# Altium PCB Mainboard.PcbDoc (part 1 of 2)
Units mm, origin at the board's own origin, x right, y up, seen from the top; angles counter-clockwise.
Board outline 100 x 100 mm, 10 copper layers (L1 SIG, L2 GND, L3 SIG HS, L4 SIG HS, L5 VDD, L6 GND, L7 SIG HS, L8 SIG HS, L9 VCC, L10 SIG), stack 1.573 mm thick; 241 components, 320 nets, 1344 pads, 20 vias.
Unrouted connection lines stored in the file: 832.
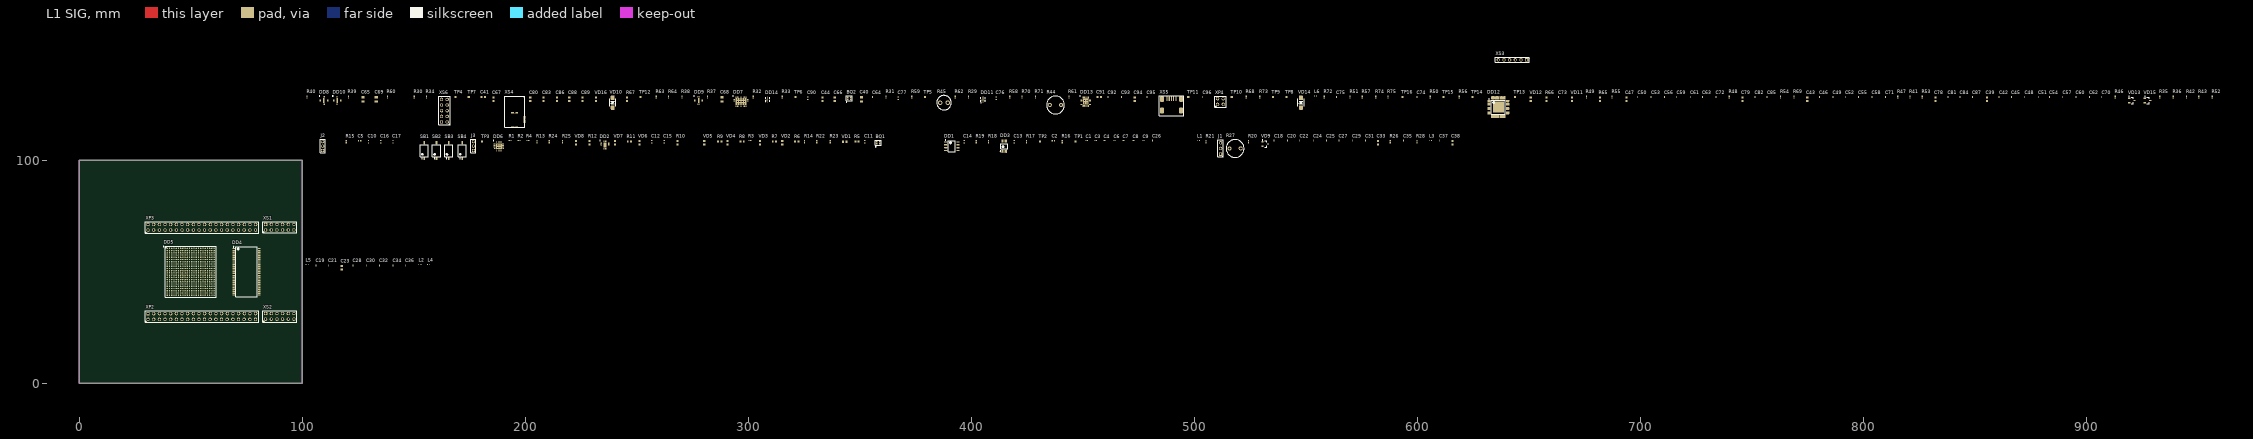
[diagram p0: L1 SIG view]
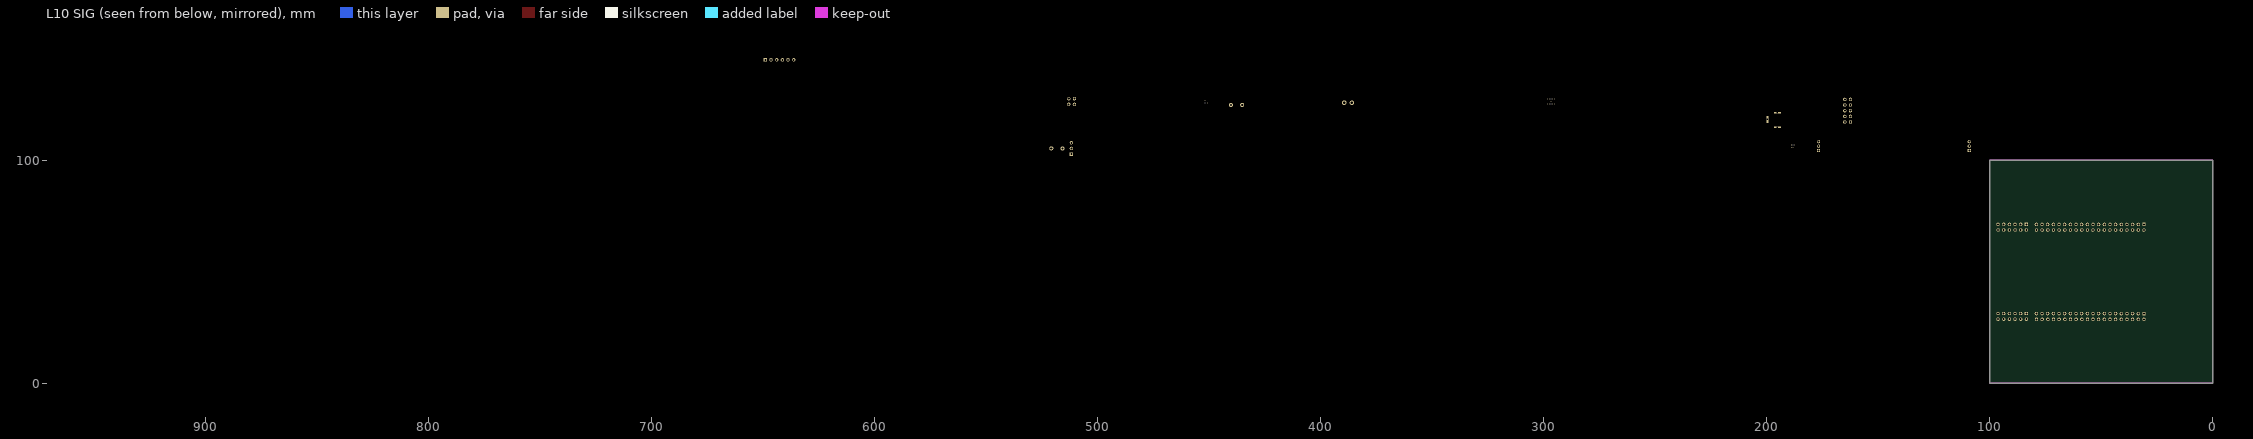
[diagram p1: L10 SIG view, seen from below]

## Layer stack, top to bottom
Top Solder: solder mask 0.0127, Solder Resist, Dk 3.3
L1 SIG: signal copper 0.0356
Dielectric 1: prepreg 0.0762, Dk 4.3
L2 GND: signal copper 0.0356
Dielectric 2: core 0.127, FR-4, Dk 4.3
L3 SIG HS: signal copper 0.0356
Dielectric 3: prepreg 0.127, Dk 4.3
L4 SIG HS: signal copper 0.0356
Dielectric 4: core 0.127, FR-4, Dk 4.3
L5 VDD: signal copper 0.0356
Dielectric 5: prepreg 0.3028, Dk 4.3
L6 GND: signal copper 0.0356
Dielectric 6: core 0.127, FR-4, Dk 4.3
L7 SIG HS: signal copper 0.0356
Dielectric 7: prepreg 0.127, Dk 4.3
L8 SIG HS: signal copper 0.0356
Dielectric 8: core 0.127, FR-4, Dk 4.3
L9 VCC: signal copper 0.0356
Dielectric 9: prepreg 0.0762, Dk 4.3
L10 SIG: signal copper 0.0356
Bottom Solder: solder mask 0.0127, Solder Resist, Dk 3.3

## Board outline
0,0 100,0 100,100 0,100

## Design rules (kind name [scope] priority, off if disabled: settings)
Clearance [All] p1: gap=0.1 ignorepadtopadclearanceinfootprint=FALSE
PolygonConnect [All] p1: connectstyle=Relief reliefconductorwidth=0.254 reliefentries=4 polygonreliefangle="90 Angle" airgapwidth=0.254
RoutingLayers [All] p1: top layer_v5=TRUE mid layer 1_v5=FALSE mid layer 2_v5=FALSE mid layer 3_v5=FALSE mid layer 4_v5=FALSE mid layer 5_v5=FALSE mid layer 6_v5=FALSE mid layer 7_v5=FALSE mid layer 8_v5=FALSE bottom layer_v5=TRUE
RoutingVias [All] p1: holewidth=0.1 width=0.2 viastyle="Through Hole" minholewidth=0.711 minwidth=1.27 maxholewidth=0.711 maxwidth=1.27
SolderMaskExpansion [All] p1: expansion=0.102
Width [All] p1: maxlimit=0.1 minlimit=0.1 preferedwidth=0.1
29 further rules are at their usual default settings.

## Classes and differential pairs
component class 01: BQ1 C1 C2 C3 C4 C5 C6 C7 C8 C9 C10 C11 C12 C13 C14 C15 C16 C17 C18 C19 C20 C21 C22 C23 C24 C25 C26 C27 C28 C29 C30 C31 C32 C33 C34 C35 C36 C37 C38 DD1 DD2 DD3 DD4 DD5 DD6 J1 J2 J3 L1 L2 L3 L4 L5 R1 R2 R3 R4 R5 R6 R7 R8 R9 R10 R11 R12 R13 R14 R15 R16 R17 R18 R19 R20 R21 R22 R23 R24 R25 R26 R27 R28 SB1 SB2 SB3 SB4 TP1 TP2 TP3 VD1 VD2 VD3 VD4 VD5 VD6 VD7 VD8 VD9 XP1 XP2 XP3 XS1 XS2
component class 02: BQ2 C39 C40 C41 C42 C43 C44 C45 C46 C47 C48 C49 C50 C51 C52 C53 C54 C55 C56 C57 C58 C59 C60 C61 C62 C63 C64 C65 C66 C67 C68 C69 C70 C71 C72 C73 C74 C75 C76 C77 C78 C79 C80 C81 C82 C83 C84 C85 C86 C87 C88 C89 C90 C91 C92 C93 C94 C95 C96 DD7 DD8 DD9 DD10 DD11 DD12 DD13 DD14 L6 R29 R30 R31 R32 R33 R34 R35 R36 R37 R38 R39 R40 R41 R42 R43 R44 R45 R46 R47 R48 R49 R50 R51 R52 R53 R54 R55 R56 R57 R58 R59 R60 R61 R62 R63 R64 R65 R66 R67 R68 R69 R70 R71 R72 R73 R74 R75 TP4 TP5 TP6 TP7 TP8 TP9 TP10 TP11 TP12 TP13 TP14 TP15 TP16 VD10 VD11 VD12 VD13 VD14 VD15 VD16 XP4 XS3 XS4 XS5 XS6

## Components (designator, comment, footprint, x,y, rotation, side; value= is the part's Value field where it differs from the comment)
BQ1 "Сlock 50 MHz 50ppm" Crystal_Clock_SMD 358.199,107.8 r0 top
BQ2 "Clock 24 MHz 50ppm DNI" Crystal_Clock_SMD 345.199,127.8 r0 top
C1 "1u" CAPC0603X03L 451.699,108.8 r0 top
C2 "100n" Cap_0402 436.699,108.8 r0 top
C3 "100n" CAPC0603X03L 455.699,108.8 r0 top
C4 "1u" CAPC0603X03L 459.699,108.8 r0 top
C5 "1u" Cap_0402 125.7,108.8 r0 top
C6 "100n" CAPC0603X03L 464.199,108.8 r0 top
C7 "1u" CAPC0603X03L 468.199,108.8 r0 top
C8 "100n" CAPC0603X03L 472.699,108.8 r0 top
C9 "10n" CAPC0603X03L 477.199,108.8 r0 top
C10 "1u" Cap_0402 129.7,108.3 r90 top
C11 "100n" Cap_0402 352.199,108.3 r90 top
C12 "1u" Cap_0402 256.699,108.3 r90 top
C13 "10n" Cap_0402 419.199,108.3 r90 top
C14 "100n" Cap_0402 396.699,108.3 r90 top
C15 "1u" Cap_0402 262.199,108.3 r90 top
C16 "1u" Cap_0402 135.2,108.3 r90 top
C17 "1u" Cap_0402 140.7,108.3 r90 top
C18 "10n" CAPC0603X03L 535.699,108.8 r90 top
C19 "100n" CAPC0603X03L 106.2,52.8 r90 top
C20 "10n" CAPC0603X03L 541.699,108.8 r90 top
C21 "100n" CAPC0603X03L 111.7,52.8 r90 top
C22 "10n" CAPC0603X03L 547.199,108.8 r90 top
C23 "10u" Cap_0603 117.7,51.8 r90 top
C24 "100n" CAPC0603X03L 553.199,108.8 r90 top
C25 "100n" CAPC0603X03L 559.199,108.8 r90 top
C26 "100n" CAPC0603X03L 481.199,108.8 r90 top
C27 "100n" CAPC0603X03L 564.699,108.8 r90 top
C28 "100n" CAPC0603X03L 122.7,52.8 r90 top
C29 "1u" CAPC0603X03L 570.699,108.8 r90 top
C30 "100n" CAPC0603X03L 128.7,52.8 r90 top
C31 "1u" CAPC0603X03L 576.699,108.8 r90 top
C32 "100n" CAPC0603X03L 134.7,52.8 r90 top
C33 "10u" Cap_0603 582.199,107.8 r90 top
C34 "100n" CAPC0603X03L 140.7,52.8 r90 top
C35 "100n" CAPC0603X03L 593.699,108.8 r90 top
C36 "100n" CAPC0603X03L 146.2,52.8 r90 top
C37 "100n" CAPC0603X03L 609.699,108.8 r90 top
C38 "10u" Cap_0603 615.699,107.8 r90 top
C39 "10u" Cap_0603 855.198,127.3 r90 top
C40 "10u" Cap_0805 350.699,127.3 r90 top
C41 "4.7u" Cap_0603 181.2,128.3 r0 top
C42 "1u" CAPC0603X03L 860.698,128.3 r90 top
C43 "10u" Cap_0603 774.698,127.3 r90 top
C44 "1u" Cap_0603 333.199,127.3 r90 top
C45 "1u" CAPC0603X03L 866.198,128.3 r90 top
C46 "1u" CAPC0603X03L 780.198,128.3 r90 top
C47 "10u" Cap_0603 693.699,127.3 r90 top
C48 "100n" CAPC0603X03L 872.198,128.3 r90 top
C49 "100n" CAPC0603X03L 786.198,128.3 r90 top
C50 "1u" CAPC0603X03L 698.699,128.3 r90 top
C51 "100n" CAPC0603X03L 878.198,128.3 r90 top
C52 "100n" CAPC0603X03L 791.698,128.3 r90 top
C53 "100n" CAPC0603X03L 704.698,128.3 r90 top
C54 "100n" CAPC0603X03L 883.198,128.3 r90 top
C55 "10n" CAPC0603X03L 797.698,128.3 r90 top
C56 "100n" CAPC0603X03L 710.698,128.3 r90 top
C57 "10n" CAPC0603X03L 889.198,128.3 r90 top
C58 "10n" CAPC0603X03L 803.698,128.3 r90 top
C59 "10n" CAPC0603X03L 716.198,128.3 r90 top
C60 "10n" CAPC0603X03L 895.198,128.3 r90 top
C61 "10n" CAPC0603X03L 722.198,128.3 r90 top
C62 "10n" CAPC0603X03L 901.198,128.3 r90 top
C63 "100n" CAPC0603X03L 727.698,128.3 r90 top
C64 "6.8p" CAPC0603X03L 355.699,128.3 r90 top
C65 "10u" Cap_0805 127.2,127.3 r90 top
C66 "4.7u" Cap_0603 338.699,127.3 r90 top
C67 "4.7u" Cap_0603 185.7,127.3 r90 top
C68 "10u" Cap_0805 288.199,127.3 r90 top
C69 "10u" Cap_0805 133.2,127.3 r90 top
C70 "100n" CAPC0603X03L 906.698,128.3 r90 top
C71 "100n" CAPC0603X03L 809.698,128.3 r90 top
C72 "100n" CAPC0603X03L 733.698,128.3 r90 top
C73 "100n" CAPC0603X03L 663.199,128.3 r90 top
C74 "100n" CAPC0603X03L 599.699,128.3 r90 top
C75 "100n" CAPC0603X03L 563.699,128.3 r90 top
C76 "100n" Cap_0402 411.199,127.8 r90 top
C77 "100n" Cap_0402 367.199,127.8 r90 top
C78 "10u" Cap_0603 832.198,127.3 r90 top
C79 "10u" Cap_0603 745.698,127.3 r90 top
C80 "22u" Cap_0603 202.199,127.3 r90 top
C81 "100n" CAPC0603X03L 837.698,128.3 r90 top
C82 "100n" CAPC0603X03L 751.198,128.3 r90 top
C83 "10u" Cap_0603 208.199,127.3 r90 top
C84 "100n" CAPC0603X03L 843.198,128.3 r90 top
C85 "100n" CAPC0603X03L 756.698,128.3 r90 top
C86 "1u" Cap_0603 214.199,127.3 r90 top
C87 "100n" CAPC0603X03L 848.698,128.3 r90 top
C88 "100n" Cap_0603 219.699,127.3 r90 top
C89 "10n" Cap_0603 225.699,127.3 r90 top
C90 "100n" Cap_0402 326.699,127.8 r90 top
C91 "10u" Cap_0603 457.199,128.3 r0 top
C92 "1u" CAPC0603X03L 461.199,128.3 r90 top
C93 "100n" CAPC0603X03L 467.199,128.3 r90 top
C94 "22u" Cap_0603 473.199,127.3 r90 top
C95 "10n" CAPC0603X03L 478.699,128.3 r90 top
C96 "100n" CAPC0603X03L 503.699,128.3 r90 top
DD1 "16Mb serial flash M25P16-VMN6" "M25P16-VMN6 _serial_flash" 391.199,106.3 r0 top
DD2 "Accelerometer 16 pins" ADXL362_Accelerometer 235.699,106.8 r0 top
DD3 "12-bit DAC" "AD5681R_12-bit DAC" 414.699,106.3 r90 top
DD4 "SDRAM 8 MB 54 pins" SDRAM_IS42S16400J-7TL 75,50 r0 top
DD5 "MAX 10 FPGFA" 10M08DAF484_V2 50,50 r0 top
DD6 "Temperature sensor ADT7420" "ADT7420_temperature sensor" 188.2,106.3 r0 top
DD7 "Enpirion Power Supply, Vout 3.3V  - 24 pin" "Enpirion Power Supply_Vout 3.3V _24pin" 296.699,126.3 r0 top
DD8 "Enpirion Power Supply, Vout 2.5V, 1.8V, 1.5V" "Enpirion Power Supply_Vout 2.5V, 1.8V, 1.5V_16pin" 109.7,126.8 r0 top
DD9 "Enpirion Power Supply, Vout 2.5V, 1.8V, 1.5V" "Enpirion Power Supply_Vout 2.5V, 1.8V, 1.5V_16pin" 277.699,126.8 r0 top
DD10 "Enpirion Power Supply, Vout 2.5V, 1.8V, 1.5V" "Enpirion Power Supply_Vout 2.5V, 1.8V, 1.5V_16pin" 115.7,126.8 r0 top
DD11 "ESD for USB Bluster" ESD_TPD6E001RSER 405.199,127.3 r90 top
DD12 "MAX V 5M80ZE64" "MAX V 5M80ZE64" 636.199,123.8 r0 top
DD13 "FT240XQ FTDI for USB Bluster 24 pin" FFTDI_240XQ-T 451.199,126.3 r0 top
DD14 "ESD for USB Bluster" ESD_TPD6E001RSER 308.699,127.3 r90 top
J1 "Jumper_J3" "CONN_J3_PIN_HEADER_1x3_2.54mm _bootselect" 511.699,105.3 r90 top
J2 "Jumper_J9" CONN_J1,J9_PIN_HEADER_1x3_2.0mm 109.2,106.3 r90 top
J3 "Jumper_J1" CONN_J1,J9_PIN_HEADER_1x3_2.0mm 176.7,106.3 r90 top
L1 "4.7u" Inductor 501.699,108.8 r0 top
L2 "4.7u" Inductor 152.7,53.3 r0 top
L3 "4.7u" Inductor 605.699,108.8 r0 top
L4 "4.7u" Inductor 156.7,53.3 r0 top
L5 "4.7u" Inductor 102.2,53.3 r0 top
L6 "4.7u" Inductor 554.199,128.8 r0 top
R1 "10k" RESISTOR_0402 193.2,108.8 r0 top
R2 "10k" RESISTOR_0402 197.2,108.8 r0 top
R3 "0" RESISTOR_0402 300.699,108.8 r0 top
R4 "10k" RESISTOR_0402 201.199,108.8 r0 top
R5 "220" Resistor_0603 348.699,108.3 r0 top
R6 "220" Resistor_0603 321.699,108.3 r0 top
R7 "220" Resistor_0603 311.699,108.3 r0 top
R8 "220" Resistor_0603 297.199,108.3 r0 top
R9 "220" Resistor_0603 287.199,108.3 r0 top
R10 "220" Resistor_0603 268.199,107.8 r90 top
R11 "220" Resistor_0603 246.699,108.3 r0 top
R12 "220" Resistor_0603 228.699,107.8 r90 top
R13 "10k" RESISTOR_0402 205.199,108.3 r90 top
R14 "10k" RESISTOR_0402 325.199,108.3 r90 top
R15 "10k" RESISTOR_0402 119.7,108.3 r90 top
R16 "10k" RESISTOR_0402 440.699,108.3 r90 top
R17 "10k" RESISTOR_0402 424.699,108.3 r90 top
R18 "10k" RESISTOR_0402 407.699,108.3 r90 top
R19 "10k" RESISTOR_0402 402.199,108.3 r90 top
R20 "10k" RESISTOR_0402 524.199,108.3 r90 top
R21 "10k" RESISTOR_0402 505.199,108.3 r90 top
R22 "4.7k" RESISTOR_0402 330.699,108.3 r90 top
R23 "4.7k" RESISTOR_0402 336.699,108.3 r90 top
R24 "4.7k" RESISTOR_0402 210.699,108.3 r90 top
R25 "4.7k" RESISTOR_0402 216.699,108.3 r90 top
R26 "12.1k" RESISTOR_0402 587.699,108.3 r90 top
R27 "*" Thermistor 518.199,105.3 r0 top
R28 "330" RESISTOR_0402 599.699,108.3 r90 top
R29 "100k" RESISTOR_0402 398.699,128.3 r90 top
R30 "100" RESISTOR_0402 150.2,128.3 r90 top
R31 "348k" RESISTOR_0402 361.699,128.3 r90 top
R32 "76.8k" RESISTOR_0402 302.199,128.3 r90 top
R33 "100" RESISTOR_0402 315.199,128.3 r90 top
R34 "100" RESISTOR_0402 155.7,128.3 r90 top
R35 "10k" RESISTOR_0402 932.698,128.3 r90 top
R36 "10k" RESISTOR_0402 938.698,128.3 r90 top
R37 "75k" RESISTOR_0402 281.699,128.3 r90 top
R38 "118k" RESISTOR_0402 270.199,128.3 r90 top
R39 "75k" RESISTOR_0402 120.7,128.3 r90 top
R40 "75k" RESISTOR_0402 102.2,128.3 r90 top
R41 "22" RESISTOR_0402 820.698,128.3 r90 top
R42 "10k" RESISTOR_0402 944.698,128.3 r90 top
R43 "1k" RESISTOR_0402 950.198,128.3 r90 top
R44 "*" Thermistor 437.699,124.8 r0 top
R45 "*" "Light Sensor" 387.699,125.8 r0 top
R46 "49.9k" RESISTOR_0402 912.698,128.3 r90 top
R47 "49.9k" RESISTOR_0402 815.198,128.3 r90 top
R48 "49.9k" RESISTOR_0402 739.698,128.3 r90 top
R49 "49.9k" RESISTOR_0402 675.699,128.3 r90 top
R50 "49.9k" RESISTOR_0402 605.699,128.3 r90 top
R51 "49.9k" RESISTOR_0402 569.699,128.3 r90 top
R52 "12.7" RESISTOR_0402 956.198,128.3 r90 top
R53 "12.7" RESISTOR_0402 826.198,128.3 r90 top
R54 "12.7" RESISTOR_0402 762.698,128.3 r90 top
R55 "12.7" RESISTOR_0402 687.199,128.3 r90 top
R56 "12.7" RESISTOR_0402 618.699,128.3 r90 top
R57 "12.7" RESISTOR_0402 575.199,128.3 r90 top
R58 "1k" RESISTOR_0402 417.199,128.3 r90 top
R59 "1k" RESISTOR_0402 373.199,128.3 r90 top
R60 "1k" RESISTOR_0402 138.2,128.3 r90 top
R61 "12.7" RESISTOR_0402 443.699,128.3 r90 top
R62 "12.7" RESISTOR_0402 392.699,128.3 r90 top
R63 "10k" RESISTOR_0402 258.699,128.3 r90 top
R64 "10k" RESISTOR_0402 264.199,128.3 r90 top
R65 "220" Resistor_0603 681.699,127.3 r90 top
R66 "220" Resistor_0603 657.699,127.3 r90 top
R67 "680" Resistor_0603 245.699,127.3 r90 top
R68 "100k" RESISTOR_0402 523.199,128.3 r90 top
R69 "22" RESISTOR_0402 768.698,128.3 r90 top
R70 "10k" RESISTOR_0402 422.699,128.3 r90 top
R71 "10k" RESISTOR_0402 428.699,128.3 r90 top
R72 "0" RESISTOR_0402 558.199,128.3 r90 top
R73 "10k" RESISTOR_0402 529.199,128.3 r90 top
R74 "10k" RESISTOR_0402 581.199,128.3 r90 top
R75 "1k" RESISTOR_0402 586.699,128.3 r90 top
SB1 "Button" Button_SMD 154.7,104.3 r90 top
SB2 "Button" Button_SMD 160.2,104.3 r90 top
SB3 "Button" Button_SMD 165.7,104.3 r90 top
SB4 "Button" Button_SMD 171.7,104.3 r90 top
TP1 "Testpoint" TP 446.699,108.3 r0 top
TP2 "Testpoint" TP 430.699,108.3 r90 top
TP3 "Testpoint" TP 180.7,108.3 r90 top
TP4 "Testpoint" TP 168.7,128.3 r90 top
TP5 "Testpoint" TP 379.199,128.3 r90 top
TP6 "Testpoint" TP 321.199,128.3 r90 top
TP7 "Testpoint" TP 174.7,128.3 r90 top
TP8 "Testpoint" TP 541.199,128.3 r90 top
TP9 "Testpoint" TP 535.199,128.3 r90 top
TP10 "Testpoint" TP 516.699,128.3 r90 top
TP11 "Testpoint" TP 497.199,128.3 r90 top
TP12 "Testpoint" TP 251.699,128.3 r90 top
TP13 "Testpoint" TP 643.699,128.3 r90 top
TP14 "Testpoint" TP 624.699,128.3 r90 top
TP15 "Testpoint" TP 611.699,128.3 r90 top
TP16 "Testpoint" TP 593.199,128.3 r90 top
VD1 "LED_green" LED_smd 343.199,108.3 r0 top
VD2 "LED_green" LED_smd 315.199,107.8 r90 top
VD3 "LED_green" LED_smd 305.199,107.8 r90 top
VD4 "LED_green" LED_smd 290.699,107.8 r90 top
VD5 "LED_green" LED_smd 280.199,107.8 r90 top
VD6 "LED_green" LED_smd 251.199,107.8 r90 top
VD7 "LED_green" LED_smd 240.199,107.8 r90 top
VD8 "LED_green" LED_smd 222.699,107.8 r90 top
VD9 "0-Diode" Diode_BAT54C 531.699,107.3 r0 top
VD10 "Diode_SMA (D13, D15)" Diode_VS_SMA 239.199,125.8 r90 top
VD11 "LED_green" LED_smd 669.199,127.3 r90 top
VD12 "LED_green" LED_smd 650.699,127.3 r90 top
VD13 "Diode (D9)" Diode_BAT54C 920.198,126.8 r0 top
VD14 "Diode_SMA (D13, D15)" Diode_VS_SMA 547.699,125.8 r90 top
VD15 "Diode (D9)" Diode_BAT54C 927.198,126.8 r0 top
VD16 "LED_red" LED_smd 231.699,127.3 r90 top
XP2 "2x20 pin headers (J4)" CONN_J4,J5_PIN_HEADER_2x20_2.54mm 55,30 r0 top
XP3 "2x20 pin headers (J5)" CONN_J4,J5_PIN_HEADER_2x20_2.54mm 55,70 r0 top
XP4 "Jumper_J11" CONN_J11-PIN_HEADER_2x2_2.54mm 511.699,126.3 r0 top
XS1 "Сonnector  PMOD Female Header" "CONN_U5, U6_Female Header 2x6, 2.54mm" 90,70 r0 top
XS2 "Сonnector  PMOD Female Header" "CONN_U5, U6_Female Header 2x6, 2.54mm" 90,30 r0 top
XS3 "JTAG connection to MAX V  (J6)" CONN_J6_PIN_HEADER_1x6_2.54mm(DNI) 642.5,145 r180 top
XS4 "Power Jack  (J10)" CONN_Power_Jack 195.2,121.8 r90 top
XS5 "Mini USB connector 9pins (J8)" CONN_MiniUSB 489.699,124.3 r0 top
XS6 "Edge connector for USB-Blaster output  (J7)" CONN_J7_PIN_HEADER_2x5_2.54mm(DNI) 163.7,122.3 r90 top

## Footprints (in the part's own frame and the unit in brackets; to place one, negate y for a bottom-side part, rotate by r counter-clockwise, add the part's x,y. Pads: shape width x height; smd on the part's side, far side on the other; paste and mask are expansions set on the pad)
10M08DAF484_V2 [mm] "MAX 10 FPGFA"
  round 0.6 smd: A1(-10.5,10.5) A2(-9.5,10.5) A3(-8.5,10.5) A4(-7.5,10.5) A5(-6.5,10.5) A6(-5.5,10.5) A7(-4.5,10.5) A8(-3.5,10.5) A9(-2.5,10.5) A10(-1.5,10.5) A11(-0.5,10.5) A12(0.5,10.5) A13(1.5,10.5) A14(2.5,10.5) A15(3.5,10.5) A16(4.5,10.5) A17(5.5,10.5) A18(6.5,10.5) A19(7.5,10.5) A20(8.5,10.5) A21(9.5,10.5) A22(10.5,10.5) AA1(-10.5,-9.5) AA2(-9.5,-9.5) AA3(-8.5,-9.5) AA4(-7.5,-9.5) AA5(-6.5,-9.5) AA6(-5.5,-9.5) AA7(-4.5,-9.5) AA8(-3.5,-9.5) AA9(-2.5,-9.5) AA10(-1.5,-9.5) AA11(-0.5,-9.5) AA12(0.5,-9.5) AA13(1.5,-9.5) AA14(2.5,-9.5) AA15(3.5,-9.5) AA16(4.5,-9.5) AA17(5.5,-9.5) AA18(6.5,-9.5) AA19(7.5,-9.5) AA20(8.5,-9.5) AA21(9.5,-9.5) AA22(10.5,-9.5) AB1(-10.5,-10.5) AB2(-9.5,-10.5) AB3(-8.5,-10.5) AB4(-7.5,-10.5) AB5(-6.5,-10.5) AB6(-5.5,-10.5) AB7(-4.5,-10.5) AB8(-3.5,-10.5) AB9(-2.5,-10.5) AB10(-1.5,-10.5) AB11(-0.5,-10.5) AB12(0.5,-10.5) AB13(1.5,-10.5) AB14(2.5,-10.5) AB15(3.5,-10.5) AB16(4.5,-10.5) AB17(5.5,-10.5) AB18(6.5,-10.5) AB19(7.5,-10.5) AB20(8.5,-10.5) AB21(9.5,-10.5) AB22(10.5,-10.5) B1(-10.5,9.5) B2(-9.5,9.5) B3(-8.5,9.5) B4(-7.5,9.5) B5(-6.5,9.5) B6(-5.5,9.5) B7(-4.5,9.5) B8(-3.5,9.5) B9(-2.5,9.5) B10(-1.5,9.5) B11(-0.5,9.5) B12(0.5,9.5) B13(1.5,9.5) B14(2.5,9.5) B15(3.5,9.5) B16(4.5,9.5) B17(5.5,9.5) B18(6.5,9.5) B19(7.5,9.5) B20(8.5,9.5) B21(9.5,9.5) B22(10.5,9.5) C1(-10.5,8.5) C2(-9.5,8.5) C3(-8.5,8.5) C4(-7.5,8.5) C5(-6.5,8.5) C6(-5.5,8.5) C7(-4.5,8.5) C8(-3.5,8.5) C9(-2.5,8.5) C10(-1.5,8.5) C11(-0.5,8.5) C12(0.5,8.5) C13(1.5,8.5) C14(2.5,8.5) C15(3.5,8.5) C16(4.5,8.5) C17(5.5,8.5) C18(6.5,8.5) C19(7.5,8.5) C20(8.5,8.5) C21(9.5,8.5) C22(10.5,8.5) D1(-10.5,7.5) D2(-9.5,7.5) D3(-8.5,7.5) D4(-7.5,7.5) D5(-6.5,7.5) D6(-5.5,7.5) D7(-4.5,7.5) D8(-3.5,7.5) D9(-2.5,7.5) D10(-1.5,7.5) D11(-0.5,7.5) D12(0.5,7.5) D13(1.5,7.5) D14(2.5,7.5) D15(3.5,7.5) D16(4.5,7.5) D17(5.5,7.5) D18(6.5,7.5) D19(7.5,7.5) D20(8.5,7.5) D21(9.5,7.5) D22(10.5,7.5) E1(-10.5,6.5) E2(-9.5,6.5) E3(-8.5,6.5) E4(-7.5,6.5) E5(-6.5,6.5) E6(-5.5,6.5) E7(-4.5,6.5) E8(-3.5,6.5) E9(-2.5,6.5) E10(-1.5,6.5) E11(-0.5,6.5) E12(0.5,6.5) E13(1.5,6.5) E14(2.5,6.5) E15(3.5,6.5) E16(4.5,6.5) E17(5.5,6.5) E18(6.5,6.5) E19(7.5,6.5) E20(8.5,6.5) E21(9.5,6.5) E22(10.5,6.5) F1(-10.5,5.5) F2(-9.5,5.5) F3(-8.5,5.5) F4(-7.5,5.5) F5(-6.5,5.5) F6(-5.5,5.5) F7(-4.5,5.5) F8(-3.5,5.5) F9(-2.5,5.5) F10(-1.5,5.5) F11(-0.5,5.5) F12(0.5,5.5) F13(1.5,5.5) F14(2.5,5.5) F15(3.5,5.5) F16(4.5,5.5) F17(5.5,5.5) F18(6.5,5.5) F19(7.5,5.5) F20(8.5,5.5) F21(9.5,5.5) F22(10.5,5.5) G1(-10.5,4.5) G2(-9.5,4.5) G3(-8.5,4.5) G4(-7.5,4.5) G5(-6.5,4.5) G6(-5.5,4.5) G7(-4.5,4.5) G8(-3.5,4.5) G9(-2.5,4.5) G10(-1.5,4.5) G11(-0.5,4.5) G12(0.5,4.5) G13(1.5,4.5) G14(2.5,4.5) G15(3.5,4.5) G16(4.5,4.5) G17(5.5,4.5) G18(6.5,4.5) G19(7.5,4.5) G20(8.5,4.5) G21(9.5,4.5) G22(10.5,4.5) H1(-10.5,3.5) H2(-9.5,3.5) H3(-8.5,3.5) H4(-7.5,3.5) H5(-6.5,3.5) H6(-5.5,3.5) H7(-4.5,3.5) H8(-3.5,3.5) H9(-2.5,3.5) H10(-1.5,3.5) H11(-0.5,3.5) H12(0.5,3.5) H13(1.5,3.5) H14(2.5,3.5) H15(3.5,3.5) H16(4.5,3.5) H17(5.5,3.5) H18(6.5,3.5) H19(7.5,3.5) H20(8.5,3.5) H21(9.5,3.5) H22(10.5,3.5) J1(-10.5,2.5) J2(-9.5,2.5) J3(-8.5,2.5) J4(-7.5,2.5) J5(-6.5,2.5) J6(-5.5,2.5) J7(-4.5,2.5) J8(-3.5,2.5) J9(-2.5,2.5) J10(-1.5,2.5) J11(-0.5,2.5) J12(0.5,2.5) J13(1.5,2.5) J14(2.5,2.5) J15(3.5,2.5) J16(4.5,2.5) J17(5.5,2.5) J18(6.5,2.5) J19(7.5,2.5) J20(8.5,2.5) J21(9.5,2.5) J22(10.5,2.5) K1(-10.5,1.5) K2(-9.5,1.5) K3(-8.5,1.5) K4(-7.5,1.5) K5(-6.5,1.5) K6(-5.5,1.5) K7(-4.5,1.5) K8(-3.5,1.5) K9(-2.5,1.5) K10(-1.5,1.5) K11(-0.5,1.5) K12(0.5,1.5) K13(1.5,1.5) K14(2.5,1.5) K15(3.5,1.5) K16(4.5,1.5) K17(5.5,1.5) K18(6.5,1.5) K19(7.5,1.5) K20(8.5,1.5) K21(9.5,1.5) K22(10.5,1.5) L1(-10.5,0.5) L2(-9.5,0.5) L3(-8.5,0.5) L4(-7.5,0.5) L5(-6.5,0.5) L6(-5.5,0.5) L7(-4.5,0.5) L8(-3.5,0.5) L9(-2.5,0.5) L10(-1.5,0.5) L11(-0.5,0.5) L12(0.5,0.5) L13(1.5,0.5) L14(2.5,0.5) L15(3.5,0.5) L16(4.5,0.5) L17(5.5,0.5) L18(6.5,0.5) L19(7.5,0.5) L20(8.5,0.5) L21(9.5,0.5) L22(10.5,0.5) M1(-10.5,-0.5) M2(-9.5,-0.5) M3(-8.5,-0.5) M4(-7.5,-0.5) M5(-6.5,-0.5) M6(-5.5,-0.5) M7(-4.5,-0.5) M8(-3.5,-0.5) M9(-2.5,-0.5) M10(-1.5,-0.5) M11(-0.5,-0.5) M12(0.5,-0.5) M13(1.5,-0.5) M14(2.5,-0.5) M15(3.5,-0.5) M16(4.5,-0.5) M17(5.5,-0.5) M18(6.5,-0.5) M19(7.5,-0.5) M20(8.5,-0.5) M21(9.5,-0.5) M22(10.5,-0.5) N1(-10.5,-1.5) N2(-9.5,-1.5) N3(-8.5,-1.5) N4(-7.5,-1.5) N5(-6.5,-1.5) N6(-5.5,-1.5) N7(-4.5,-1.5) N8(-3.5,-1.5) N9(-2.5,-1.5) N10(-1.5,-1.5) N11(-0.5,-1.5) N12(0.5,-1.5) N13(1.5,-1.5) N14(2.5,-1.5) N15(3.5,-1.5) N16(4.5,-1.5) N17(5.5,-1.5) N18(6.5,-1.5) N19(7.5,-1.5) N20(8.5,-1.5) N21(9.5,-1.5) N22(10.5,-1.5) P1(-10.5,-2.5) P2(-9.5,-2.5) P3(-8.5,-2.5) P4(-7.5,-2.5) P5(-6.5,-2.5) P6(-5.5,-2.5) P7(-4.5,-2.5) P8(-3.5,-2.5) P9(-2.5,-2.5) P10(-1.5,-2.5) P11(-0.5,-2.5) P12(0.5,-2.5) P13(1.5,-2.5) P14(2.5,-2.5) P15(3.5,-2.5) P16(4.5,-2.5) P17(5.5,-2.5) P18(6.5,-2.5) P19(7.5,-2.5) P20(8.5,-2.5) P21(9.5,-2.5) P22(10.5,-2.5) R1(-10.5,-3.5) R2(-9.5,-3.5) R3(-8.5,-3.5) R4(-7.5,-3.5) R5(-6.5,-3.5) R6(-5.5,-3.5) R7(-4.5,-3.5) R8(-3.5,-3.5) R9(-2.5,-3.5) R10(-1.5,-3.5) R11(-0.5,-3.5) R12(0.5,-3.5) R13(1.5,-3.5) R14(2.5,-3.5) R15(3.5,-3.5) R16(4.5,-3.5) R17(5.5,-3.5) R18(6.5,-3.5) R19(7.5,-3.5) R20(8.5,-3.5) R21(9.5,-3.5) R22(10.5,-3.5) T1(-10.5,-4.5) T2(-9.5,-4.5) T3(-8.5,-4.5) T4(-7.5,-4.5) T5(-6.5,-4.5) T6(-5.5,-4.5) T7(-4.5,-4.5) T8(-3.5,-4.5) T9(-2.5,-4.5) T10(-1.5,-4.5) T11(-0.5,-4.5) T12(0.5,-4.5) T13(1.5,-4.5) T14(2.5,-4.5) T15(3.5,-4.5) T16(4.5,-4.5) T17(5.5,-4.5) T18(6.5,-4.5) T19(7.5,-4.5) T20(8.5,-4.5) T21(9.5,-4.5) T22(10.5,-4.5) U1(-10.5,-5.5) U2(-9.5,-5.5) U3(-8.5,-5.5) U4(-7.5,-5.5) U5(-6.5,-5.5) U6(-5.5,-5.5) U7(-4.5,-5.5) U8(-3.5,-5.5) U9(-2.5,-5.5) U10(-1.5,-5.5) U11(-0.5,-5.5) U12(0.5,-5.5) U13(1.5,-5.5) U14(2.5,-5.5) U15(3.5,-5.5) U16(4.5,-5.5) U17(5.5,-5.5) U18(6.5,-5.5) U19(7.5,-5.5) U20(8.5,-5.5) U21(9.5,-5.5) U22(10.5,-5.5) V1(-10.5,-6.5) V2(-9.5,-6.5) V3(-8.5,-6.5) V4(-7.5,-6.5) V5(-6.5,-6.5) V6(-5.5,-6.5) V7(-4.5,-6.5) V8(-3.5,-6.5) V9(-2.5,-6.5) V10(-1.5,-6.5) V11(-0.5,-6.5) V12(0.5,-6.5) V13(1.5,-6.5) V14(2.5,-6.5) V15(3.5,-6.5) V16(4.5,-6.5) V17(5.5,-6.5) V18(6.5,-6.5) V19(7.5,-6.5) V20(8.5,-6.5) V21(9.5,-6.5) V22(10.5,-6.5) W1(-10.5,-7.5) W2(-9.5,-7.5) W3(-8.5,-7.5) W4(-7.5,-7.5) W5(-6.5,-7.5) W6(-5.5,-7.5) W7(-4.5,-7.5) W8(-3.5,-7.5) W9(-2.5,-7.5) W10(-1.5,-7.5) W11(-0.5,-7.5) W12(0.5,-7.5) W13(1.5,-7.5) W14(2.5,-7.5) W15(3.5,-7.5) W16(4.5,-7.5) W17(5.5,-7.5) W18(6.5,-7.5) W19(7.5,-7.5) W20(8.5,-7.5) W21(9.5,-7.5) W22(10.5,-7.5) Y1(-10.5,-8.5) Y2(-9.5,-8.5) Y3(-8.5,-8.5) Y4(-7.5,-8.5) Y5(-6.5,-8.5) Y6(-5.5,-8.5) Y7(-4.5,-8.5) Y8(-3.5,-8.5) Y9(-2.5,-8.5) Y10(-1.5,-8.5) Y11(-0.5,-8.5) Y12(0.5,-8.5) Y13(1.5,-8.5) Y14(2.5,-8.5) Y15(3.5,-8.5) Y16(4.5,-8.5) Y17(5.5,-8.5) Y18(6.5,-8.5) Y19(7.5,-8.5) Y20(8.5,-8.5) Y21(9.5,-8.5) Y22(10.5,-8.5)
  silkscreen extent -12.27,-11.5 11.5,11.5, body extent -11.5,-11.5 11.5,11.5, height 2.4
"AD5681R_12-bit DAC" [mm]
  oval 1.4x0.3 smd: 1(-2.25,1) 2(-2.25,0.5) 3(-2.25,0) 4(-2.25,-0.5) 5(-2.25,-1) 6(2.25,-1) 7(2.25,-0.5) 8(2.25,0) 9(2.25,0.5) 10(2.25,1)
  silkscreen extent -2.37,-1.55 1.15,1.82, body extent -1.55,-1.55 1.55,1.55, height 1.1
"ADT7420_temperature sensor" [mm]
  oval 0.9x0.3 smd: 1(1.9,0.975) 2(1.9,0.325) 3(1.9,-0.325) 4(1.9,-0.975) 9(-1.9,-0.975) 10(-1.9,-0.325) 11(-1.9,0.325) 12(-1.9,0.975)
  oval 0.3x0.9 smd: 5(0.975,-1.9) 6(0.325,-1.9) 7(-0.325,-1.9) 8(-0.975,-1.9) 13(-0.975,1.9) 14(-0.325,1.9) 15(0.325,1.9) 16(0.975,1.9)
  rect 2.5x2.5 smd: 17(0,0)
  silkscreen extent -2.62,2.38 -2.37,2.62, body extent -2.05,-2.05 2.05,2.05, height 0.8
ADXL362_Accelerometer [mm]
  oval 0.65x0.3 smd: 1(1.75,1) 2(1.75,0.5) 3(1.75,0) 4(1.75,-0.5) 5(1.75,-1) 9(-1.75,-1) 10(-1.75,-0.5) 11(-1.75,0) 12(-1.75,0.5) 13(-1.75,1)
  oval 0.3x0.65 smd: 6(0.5,-1.65) 7(0,-1.65) 8(-0.5,-1.65) 14(-0.5,1.65) 15(0,1.65) 16(0.5,1.65)
  rect 1.3x2.3 smd: 17(0,0)
  silkscreen extent -2.35,2 -2.1,2.25, body extent -1.78,-1.68 1.78,1.68, height 1.14
Button_SMD [mm] "Micro SMD PushButton 3.7x6.1x2.5mm 2P"
  rect 1.5x0.8 smd: 1(-3.5,0) 2(3.5,0)
  silkscreen extent -3.62,-1.85 2.65,1.85, body extent -3.05,-1.85 3.05,1.85, height 2.5
Cap_0402 [mm]
  rect 0.54x0.64 smd: 1(-0.5,0) 2(0.5,0)
  body extent -0.5,-0.25 0.5,0.25, height 0.55
Cap_0603 [mm]
  rect 0.9x0.95 smd: 1(-0.775,0) 2(0.775,0)
  body extent -0.8,-0.4 0.8,0.4, height 0.9
Cap_0805 [mm]
  rect 1x1.4 smd: 1(-0.925,0) 2(0.925,0)
  body extent -1,-0.63 1,0.63, height 1.3
CAPC0603X03L [mm] "Chip Capacitor, 2-Leads, Body 0,60x0,30mm, IPC High Density"
  rect 0.42x0.32 smd: 1(-0.26,0) 2(0.26,0)
  body extent -0.33,-0.18 0.33,0.18, height 0.35
CONN_J1,J9_PIN_HEADER_1x3_2.0mm [mm] "PIN_HEADER_1x3_2.0mm"
  rect 1.4x1.4 hole 0.9 unplated: 1(-1.995,0)
  round 1.4 hole 0.9: 2(0.005,0) 3(2.005,0)
  silkscreen extent -3,-1.07 3.03,1.05, body extent -3,-1.08 3.03,1.05, height 8.54
"CONN_J3_PIN_HEADER_1x3_2.54mm _bootselect" [mm] "PIN_HEADER_1x3_2.54mm"
  rect 1.5x1.5 hole 0.9 unplated: 1(-2.535,0)
  round 1.5 hole 0.9: 2(0.005,0) 3(2.545,0)
  silkscreen extent -3.74,-1.2 3.88,1.2, body extent -3.73,-1.2 3.88,1.2, height 8.54
CONN_J4,J5_PIN_HEADER_2x20_2.54mm [mm] "PIN_HEADER_2x20_2.54mm"
  rect 1.5x1.5 hole 0.9 unplated: 1(-24.11,1.24)
  round 1.5 hole 0.9: 2(-21.57,1.24) 3(-19.03,1.24) 4(-16.49,1.24) 5(-13.95,1.24) 6(-11.435,1.25) 7(-8.895,1.25) 8(-6.355,1.25) 9(-3.815,1.25) 10(-1.275,1.25) 11(1.265,1.25) 12(3.805,1.25) 13(6.345,1.25) 14(8.885,1.25) 15(11.425,1.25) 16(13.965,1.25) 17(16.505,1.25) 18(19.045,1.25) 19(21.585,1.25) 20(24.125,1.25) 21(-24.11,-1.3) 22(-21.57,-1.3) 23(-19.03,-1.3) 24(-16.49,-1.3) 25(-13.95,-1.3) 26(-11.41,-1.3) 27(-8.87,-1.3) 28(-6.33,-1.3) 29(-3.79,-1.3) 30(-1.25,-1.3) 31(1.215,-1.3) 32(3.755,-1.3) 33(6.295,-1.3) 34(8.835,-1.3) 35(11.375,-1.3) 36(13.915,-1.3) 37(16.455,-1.3) 38(18.995,-1.3) 39(21.535,-1.3) 40(24.075,-1.3)
  silkscreen extent -25.31,-2.61 25.47,2.44, body extent -25.3,-2.63 25.48,2.45, height 8.54
CONN_J6_PIN_HEADER_1x6_2.54mm(DNI) [mm] "PIN_HEADER_1x6_2.54mm(DNI)"
  rect 1.5x1.5 hole 0.9 unplated: 1(-6.36,-0.025)
  round 1.5 hole 0.9: 2(-3.82,-0.025) 3(-1.28,-0.025) 4(1.26,-0.025) 5(3.8,-0.025) 6(6.34,-0.025)
  silkscreen extent -7.56,-1.23 7.61,1.17, body extent -7.55,-1.23 7.6,1.15, height 8.54
CONN_J7_PIN_HEADER_2x5_2.54mm(DNI) [mm] "PIN_HEADER_2x5_2.54mm(DNI)"
  rect 1.5x1.5 hole 0.9 unplated: 1(-5.18,1.24)
  round 1.5 hole 0.9: 2(-2.64,1.24) 3(-0.1,1.24) 4(2.44,1.24) 5(4.98,1.24) 6(-5.18,-1.3) 7(-2.64,-1.3) 8(-0.1,-1.3) 9(2.44,-1.3) 10(4.98,-1.3)
  silkscreen extent -6.38,-2.61 6.31,2.44, body extent -6.35,-2.6 6.3,2.45, height 8.54
CONN_J11-PIN_HEADER_2x2_2.54mm [mm] "Analog input (AIN1 and AIN2)"
  round 1.5 hole 0.9 unplated: 1(-1.36,1.3)
  round 1.5 hole 0.9: 2(1.18,1.3) 3(-1.36,-1.24) 4(1.19,-1.24)
  silkscreen extent -2.56,-2.48 2.45,2.5, body extent -2.65,-2.57 2.55,2.6, height 8.54
CONN_MiniUSB [mm]
  rrect50% 0.5x2.2 smd mask+0.075: 1(1.925,3.3) 2(0.95,3.3) 3(-0.025,3.3) 4(-1.025,3.3) 5(-2.025,3.3)
  rrect50% 2x2.5 smd mask+0.075: 6(4.275,3.175) 7(4.275,-2) 8(-4.275,3.15) 9(-4.275,-2)
  silkscreen extent -5.45,-4.43 5.45,4.57, body extent -5.45,-4.43 5.45,4.58, height 3.95
CONN_Power_Jack [mm] "3.50mm (0.141\", 1/8\", Mini Plug) - Headphone Phone Jack Stereo Connector Solder"
  rect 0.8x3 hole 0.5 square unplated: 1(-7.05,0) 3(-0.475,0)
  rect 3x0.8 hole 0.5 square unplated: 2(-3.5,-4.475)
  silkscreen extent -7.02,-4.5 7,4.5, body extent -7.12,-4.6 7.1,4.6, height 16
"CONN_U5, U6_Female Header 2x6, 2.54mm" [mm] "Female Header 2x6, 2.54mm"
  rect 1.5x1.5 hole 0.9 unplated: 1(-6.41,1.275)
  round 1.5 hole 0.9: 2(-3.87,1.275) 3(-1.33,1.275) 4(1.21,1.275) 5(3.75,1.275) 6(6.29,1.275) 8(-3.87,-1.265) 9(-1.33,-1.265) 10(1.21,-1.265) 11(3.75,-1.265) 12(6.29,-1.265)
  round 1.5 hole 0.9 unplated: 7(-6.41,-1.265)
  silkscreen extent -7.61,-2.53 7.56,2.47, body extent -7.61,-2.52 7.56,2.47, height 8.54
Crystal_Clock_SMD [mm] "Crystal Clock -40°C ~ 85°C Surface Mount 4-SMD, No Lead"
  rect 0.75x0.65 smd: 1(-0.65,-0.5) 2(0.65,-0.5) 3(0.65,0.5) 4(-0.65,0.5)
  silkscreen extent -1.3,-1.87 1.3,1.1, body extent -1,-0.8 1,0.8, height 0.59
Diode_BAT54C [mm] "SOT23, 3-Leads, Body 2,90x2,45mm, Pitch 0,95mm, IPC Medium Density"
  rect 1x0.6 smd: 1(-1.2,0.95) 2(-1.2,-0.95) 3(1.2,0)
  silkscreen extent -1.32,-1.5 0.7,1.92, body extent -0.7,-1.5 0.7,1.5, height 1.2
Diode_VS_SMA [mm] "SMA"
  rrect50% 2.1x1.8 smd: 1(-2.2,0) 2(2.2,0)
  silkscreen extent -1.65,-1.4 1.75,1.4, body extent -2.75,-1.4 2.75,1.4, height 2.6
"Enpirion Power Supply_Vout 2.5V, 1.8V, 1.5V_16pin" [mm]
  oval 0.7x0.25 smd: 1(-1.65,1.25) 2(-1.65,0.75) 3(-1.65,0.25) 4(-1.65,-0.25) 5(-1.65,-0.75) 6(-1.65,-1.25) 9(1.65,-1.25) 10(1.65,-0.75) 11(1.65,-0.25) 12(1.65,0.25) 13(1.65,0.75) 14(1.65,1.25)
  oval 0.25x0.7 smd: 7(-0.25,-1.65) 8(0.25,-1.65) 15(0.25,1.65) 16(-0.25,1.65)
  rect 0.75x2.2 smd: 17(0,0)
  silkscreen extent -2.12,1.88 -1.87,2.12, body extent -1.55,-1.55 1.55,1.55, height 1.15
"Enpirion Power Supply_Vout 3.3V _24pin" [mm]
  oval 0.65x0.3 smd: 1(-3.025,0.975) 2(-3.025,0.325) 3(-3.025,-0.325) 4(-3.025,-0.975) 13(3.025,-0.975) 14(3.025,-0.325) 15(3.025,0.325) 16(3.025,0.975)
  oval 0.3x0.65 smd: 5(-2.275,-2.025) 6(-1.625,-2.025) 7(-0.975,-2.025) 8(-0.325,-2.025) 9(0.325,-2.025) 10(0.975,-2.025) 11(1.625,-2.025) 12(2.275,-2.025) 17(2.275,2.025) 18(1.625,2.025) 19(0.975,2.025) 20(0.325,2.025) 21(-0.325,2.025) 22(-0.975,2.025) 23(-1.625,2.025) 24(-2.275,2.025)
  rect 5x3 smd: 25(0,0)
  silkscreen extent -3.62,2.38 -3.37,2.62, body extent -3.1,-2.1 3.1,2.1, height 1.15
ESD_TPD6E001RSER [mm] "QFN, 10-Leads, Body 2,00x1,50mm, Pitch 0,50mm, Thermal Pad 1,50x0,30mm, IPC Medium Density QFN10-RSE"
  rect 0.25x0.4 smd: 1(-0.75,0.875) 2(-0.25,0.875) 3(0.25,0.875) 4(0.75,0.875) 6(0.75,-0.875) 7(0.25,-0.875) 8(-0.25,-0.875) 9(-0.75,-0.875)
  rect 0.4x0.25 smd: 5(1.125,0) 10(-1.125,0)
  rect 1.5x0.3 smd: 11(0,0)
  silkscreen extent -1.57,-0.92 1.03,0.97, body extent -1.02,-0.77 1.03,0.77, height 0.6
FFTDI_240XQ-T [mm]
  oval 0.85x0.25 smd: 1(1.9,1.25) 2(1.9,0.75) 3(1.9,0.25) 4(1.9,-0.25) 5(1.9,-0.75) 6(1.9,-1.25) 13(-1.9,-1.25) 14(-1.9,-0.75) 15(-1.9,-0.25) 16(-1.9,0.25) 17(-1.9,0.75) 18(-1.9,1.25)
  oval 0.25x0.85 smd: 7(1.25,-1.9) 8(0.75,-1.9) 9(0.25,-1.9) 10(-0.25,-1.9) 11(-0.75,-1.9) 12(-1.25,-1.9) 19(-1.25,1.9) 20(-0.75,1.9) 21(-0.25,1.9) 22(0.25,1.9) 23(0.75,1.9) 24(1.25,1.9)
  rect 2.58x2.58 smd: 25(0,0)
  silkscreen extent -2.57,2.33 -2.32,2.57, body extent -2,-2 2,2, height 0.8
Inductor [mm] "Chip Inductor, 2-Leads, Body 1,00x0,50mm, IPC High Density"
  rect 0.34x0.52 smd: 1(-0.48,0) 2(0.48,0)
  body extent -0.53,-0.28 0.53,0.28, height 0.55
LED_smd [mm]
  rect 0.85x0.95 smd: 1(-0.8,0) 2(0.8,0)
  body extent -0.8,-0.4 0.8,0.4, height 0.3
"Light Sensor" [mm] "Photo Resistor PGM5526"
  round 2 hole 1.2: 1(-1.725,-0.025) 2(1.7,0)
  silkscreen extent -3.25,-3.25 3.25,3.25, body extent -3.25,-3.25 3.25,3.25, height 4
"M25P16-VMN6 _serial_flash" [mm] "SOIC, 8-Leads, Body 4,95x3,95mm, Pitch 1,27mm, IPC Medium Density"
  oval 1.5x0.6 smd: 1(-2.75,1.905) 2(-2.75,0.635) 3(-2.75,-0.635) 4(-2.75,-1.905) 5(2.75,-1.905) 6(2.75,-0.635) 7(2.75,0.635) 8(2.75,1.905)
  silkscreen extent -2.87,-2.5 1.6,2.88, body extent -2,-2.5 2,2.5, height 1.75
"MAX V 5M80ZE64" [mm] "TSQFP, 64-Leads, Body 7,00x7,00mm, Pitch 0,40mm, IPC Medium Density"
  oval 1.4x0.3 smd: 1(-4.2,3) 2(-4.2,2.6) 3(-4.2,2.2) 4(-4.2,1.8) 5(-4.2,1.4) 6(-4.2,1) 7(-4.2,0.6) 8(-4.2,0.2) 9(-4.2,-0.2) 10(-4.2,-0.6) 11(-4.2,-1) 12(-4.2,-1.4) 13(-4.2,-1.8) 14(-4.2,-2.2) 15(-4.2,-2.6) 16(-4.2,-3) 33(4.2,-3) 34(4.2,-2.6) 35(4.2,-2.2) 36(4.2,-1.8) 37(4.2,-1.4) 38(4.2,-1) 39(4.2,-0.6) 40(4.2,-0.2) 41(4.2,0.2) 42(4.2,0.6) 43(4.2,1) 44(4.2,1.4) 45(4.2,1.8) 46(4.2,2.2) 47(4.2,2.6) 48(4.2,3)
  oval 0.3x1.4 smd: 17(-3,-4.2) 18(-2.6,-4.2) 19(-2.2,-4.2) 20(-1.8,-4.2) 21(-1.4,-4.2) 22(-1,-4.2) 23(-0.6,-4.2) 24(-0.2,-4.2) 25(0.2,-4.2) 26(0.6,-4.2) 27(1,-4.2) 28(1.4,-4.2) 29(1.8,-4.2) 30(2.2,-4.2) 31(2.6,-4.2) 32(3,-4.2) 49(3,4.2) 50(2.6,4.2) 51(2.2,4.2) 52(1.8,4.2) 53(1.4,4.2) 54(1,4.2) 55(0.6,4.2) 56(0.2,4.2) 57(-0.2,4.2) 58(-0.6,4.2) 59(-1,4.2) 60(-1.4,4.2) 61(-1.8,4.2) 62(-2.2,4.2) 63(-2.6,4.2) 64(-3,4.2)
  rect 5x5 smd: 65(0,0)
  silkscreen extent -4.32,-3.1 3.1,3.82, body extent -3.5,-3.5 3.5,3.5, height 1.2
RESISTOR_0402 [mm]
  rect 0.6x0.55 smd: 1(-0.425,0) 2(0.425,0)
  body extent -0.5,-0.25 0.5,0.25, height 0.2
Resistor_0603 [mm]
  rect 0.85x0.9 smd: 1(-0.75,0) 2(0.75,0)
  body extent -0.8,-0.43 0.8,0.42, height 0.3
SDRAM_IS42S16400J-7TL [mm] "TSOP, 54-Leads, Body 22,22x10,16mm, Pitch 0,80mm, IPC Medium Density"
  oval 1.2x0.55 smd: 1(-5.75,10.4) 2(-5.75,9.6) 3(-5.75,8.8) 4(-5.75,8) 5(-5.75,7.2) 6(-5.75,6.4) 7(-5.75,5.6) 8(-5.75,4.8) 9(-5.75,4) 10(-5.75,3.2) 11(-5.75,2.4) 12(-5.75,1.6) 13(-5.75,0.8) 14(-5.75,0) 15(-5.75,-0.8) 16(-5.75,-1.6) 17(-5.75,-2.4) 18(-5.75,-3.2) 19(-5.75,-4) 20(-5.75,-4.8) 21(-5.75,-5.6) 22(-5.75,-6.4) 23(-5.75,-7.2) 24(-5.75,-8) 25(-5.75,-8.8) 26(-5.75,-9.6) 27(-5.75,-10.4) 28(5.75,-10.4) 29(5.75,-9.6) 30(5.75,-8.8) 31(5.75,-8) 32(5.75,-7.2) 33(5.75,-6.4) 34(5.75,-5.6) 35(5.75,-4.8) 36(5.75,-4) 37(5.75,-3.2) 38(5.75,-2.4) 39(5.75,-1.6) 40(5.75,-0.8) 41(5.75,0) 42(5.75,0.8) 43(5.75,1.6) 44(5.75,2.4) 45(5.75,3.2) 46(5.75,4) 47(5.75,4.8) 48(5.75,5.6) 49(5.75,6.4) 50(5.75,7.2) 51(5.75,8) 52(5.75,8.8) 53(5.75,9.6) 54(5.75,10.4)
  silkscreen extent -5.87,-11.2 4.75,11.35, body extent -5.15,-11.2 5.15,11.2, height 1.2
Thermistor [mm] "Thermistor"
  round 1.8 hole 1: 1(-2.55,0) 2(2.5,0)
  silkscreen extent -4,-4 4,4, body extent -4,-4 4,4, height 21
TP [mm] "Test_Point"
  rect 0.9x0.95 smd: 1(0,0.025)